# EAGLE board stencil (EAGLE 9.1.1), part 1 of 2
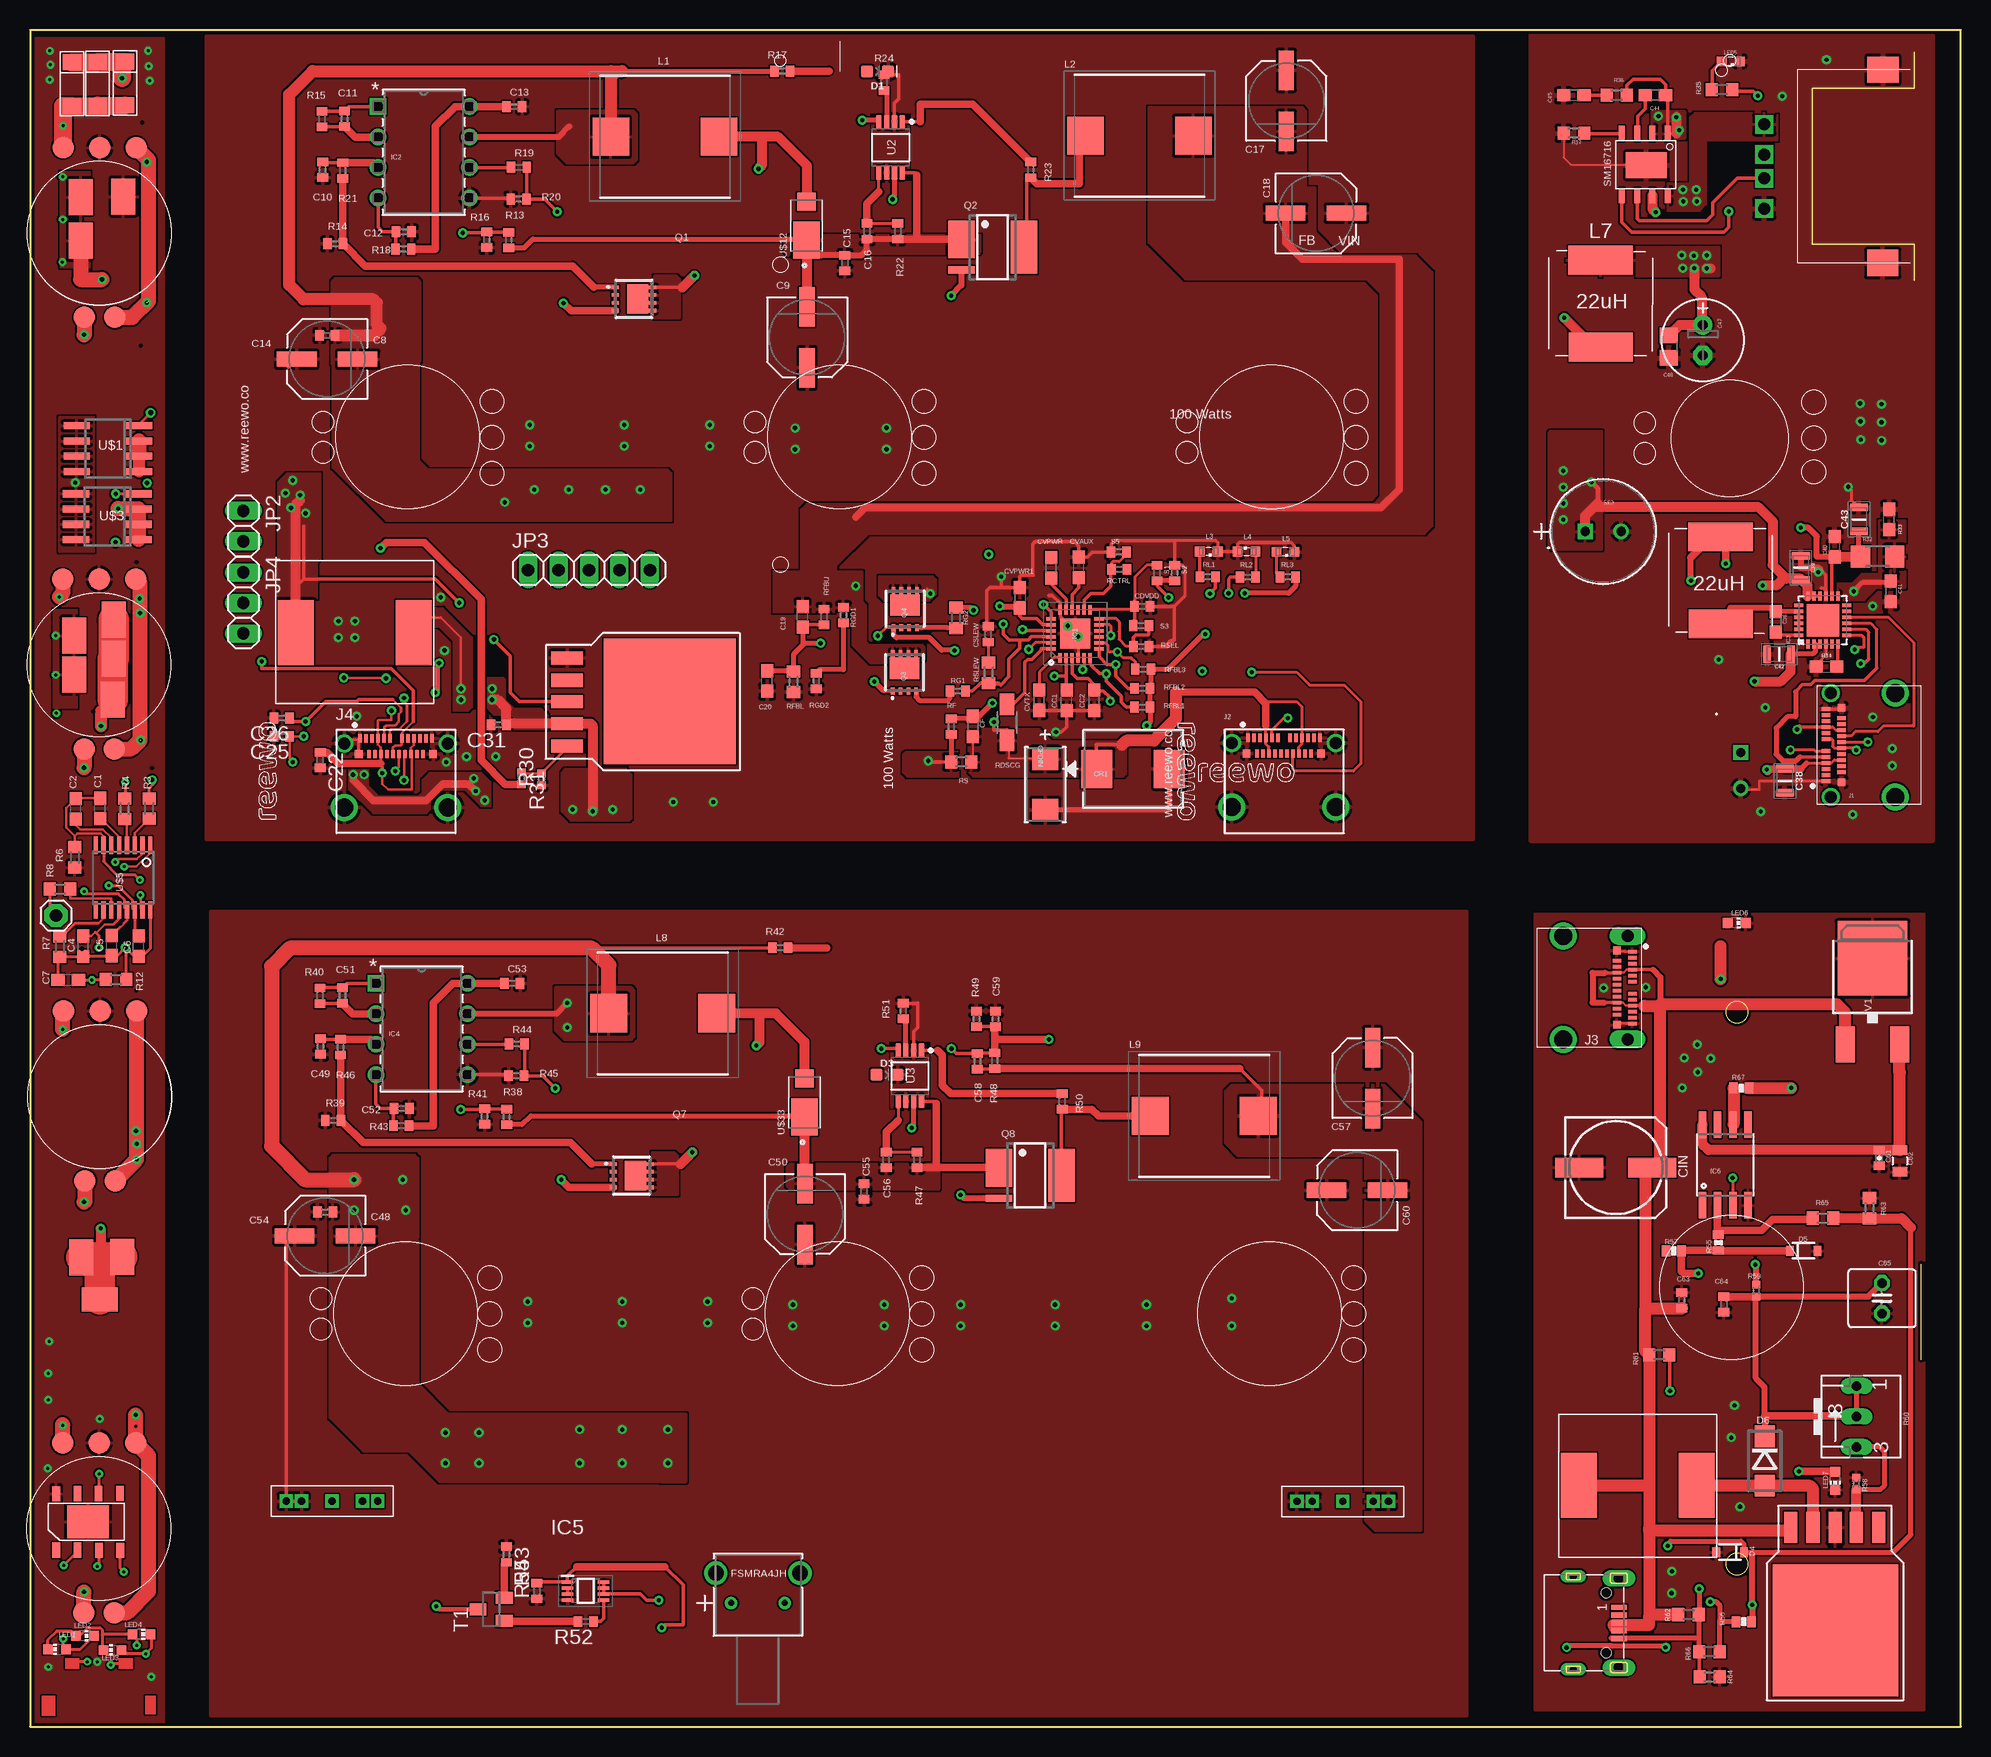
[diagram p0: board, top side]
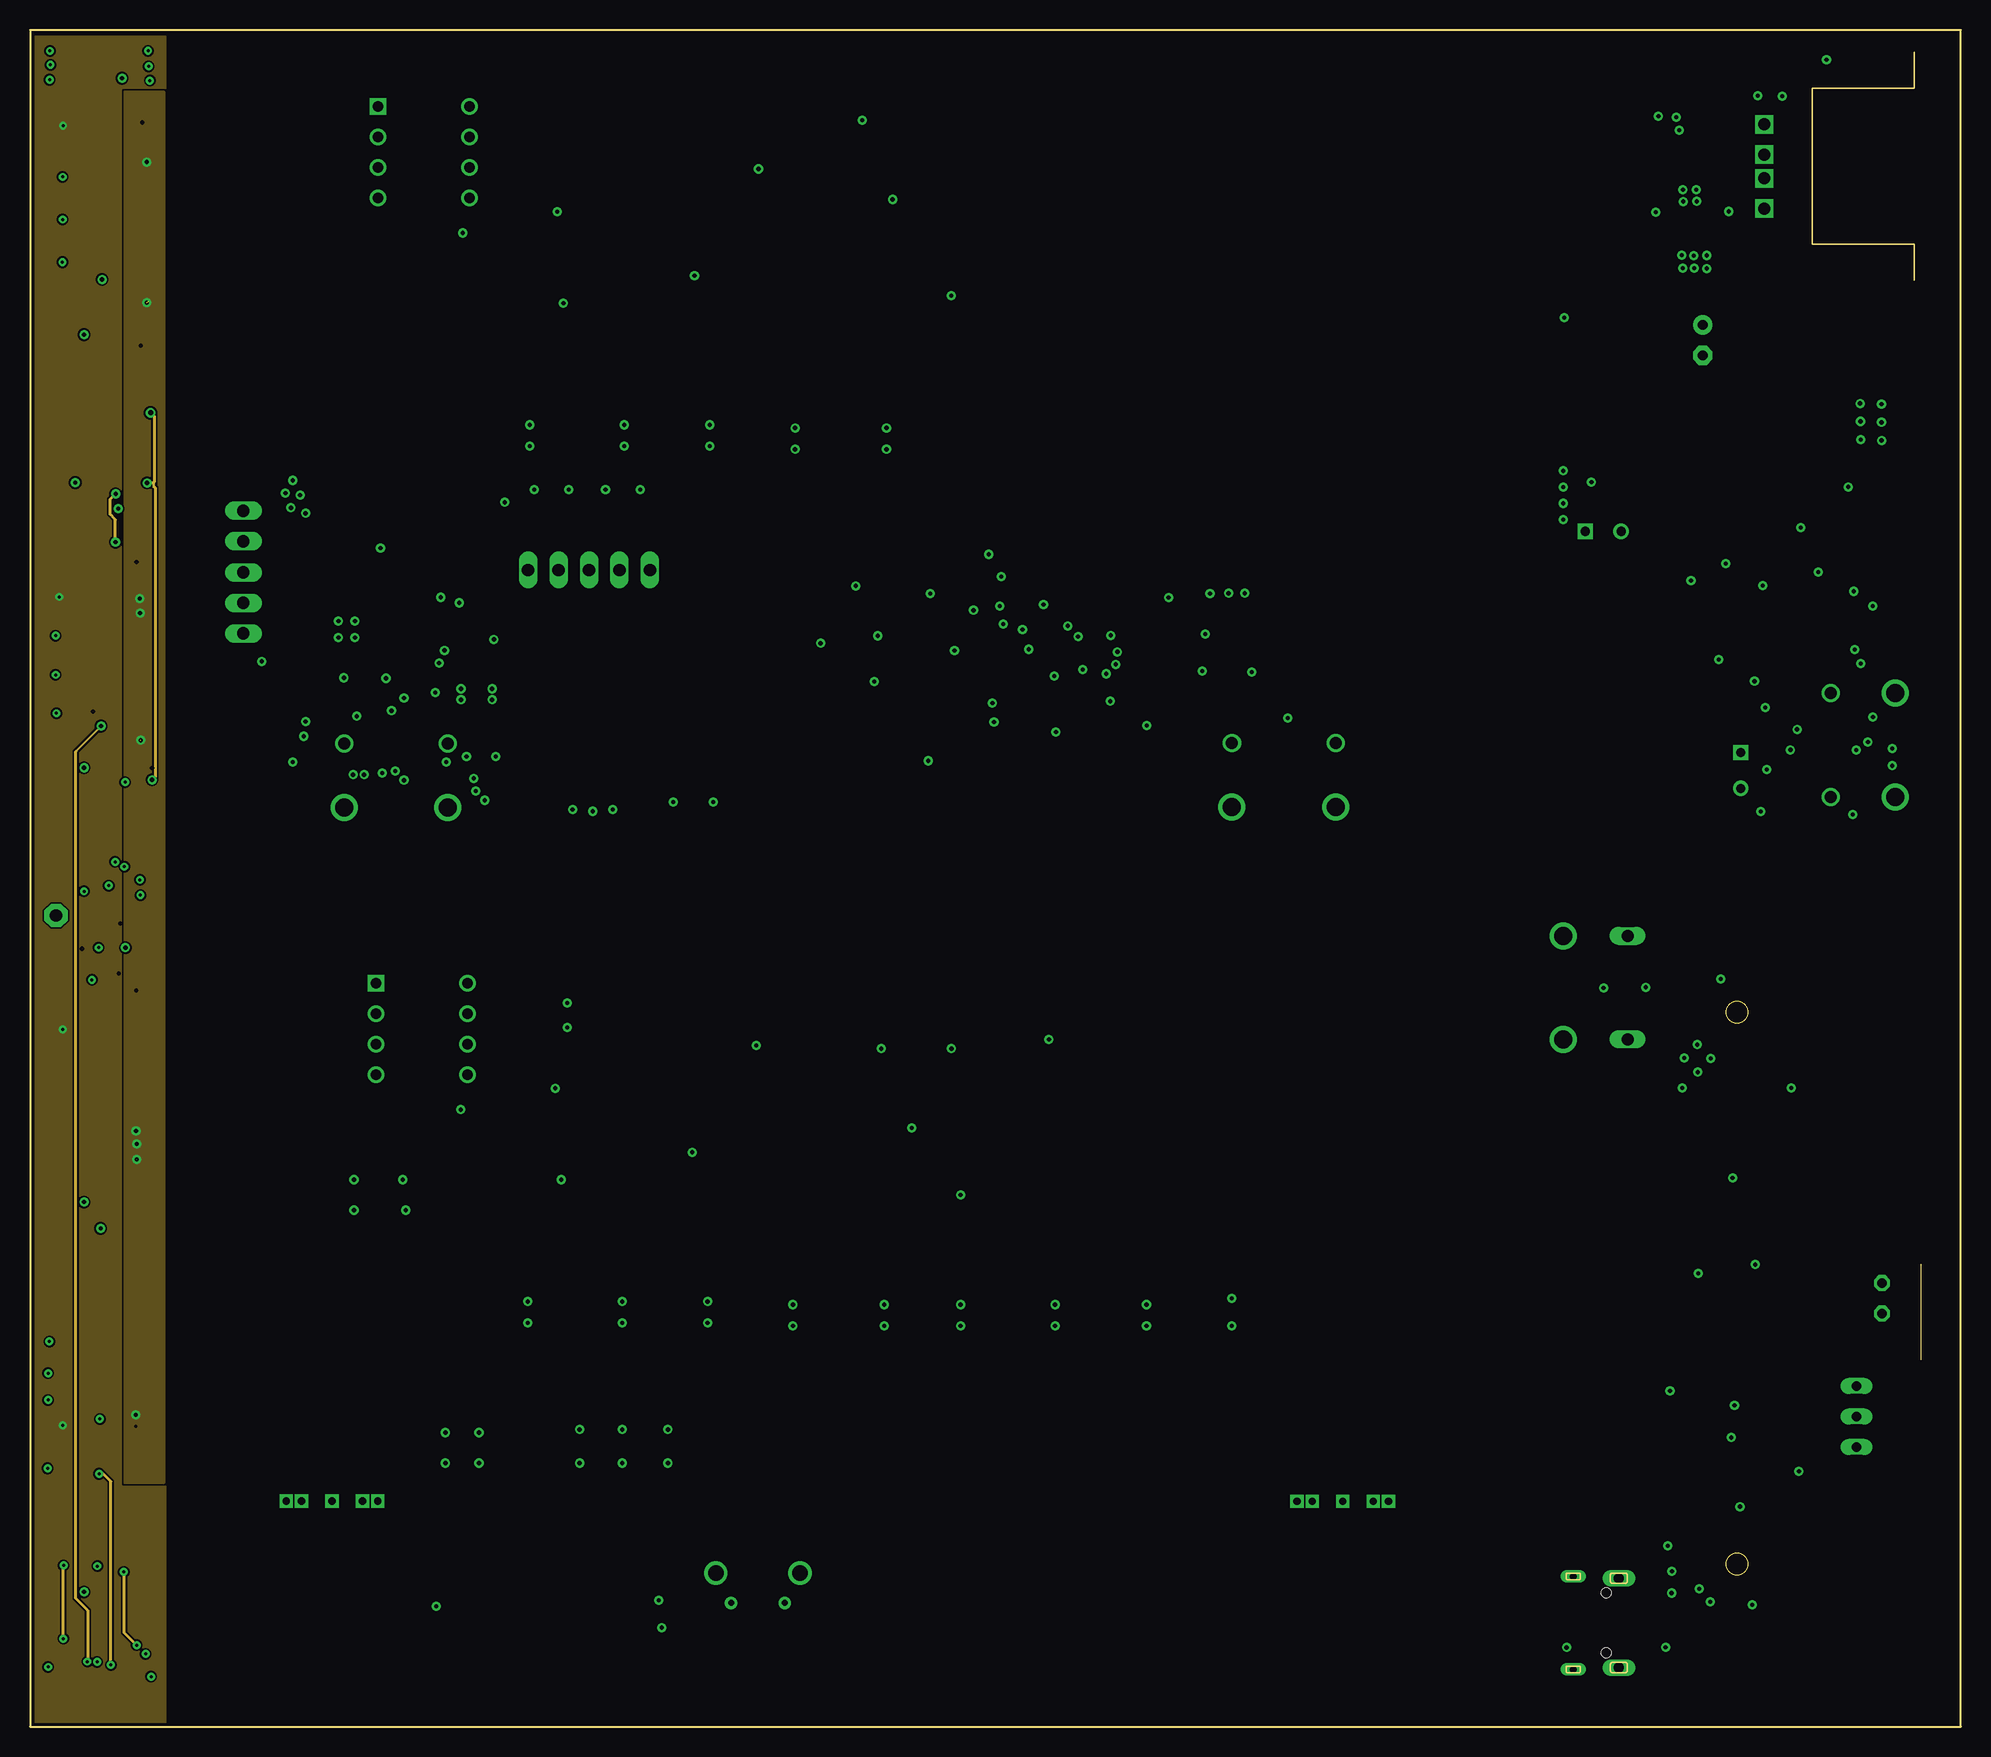
[diagram p1: board, inner layer Route2]
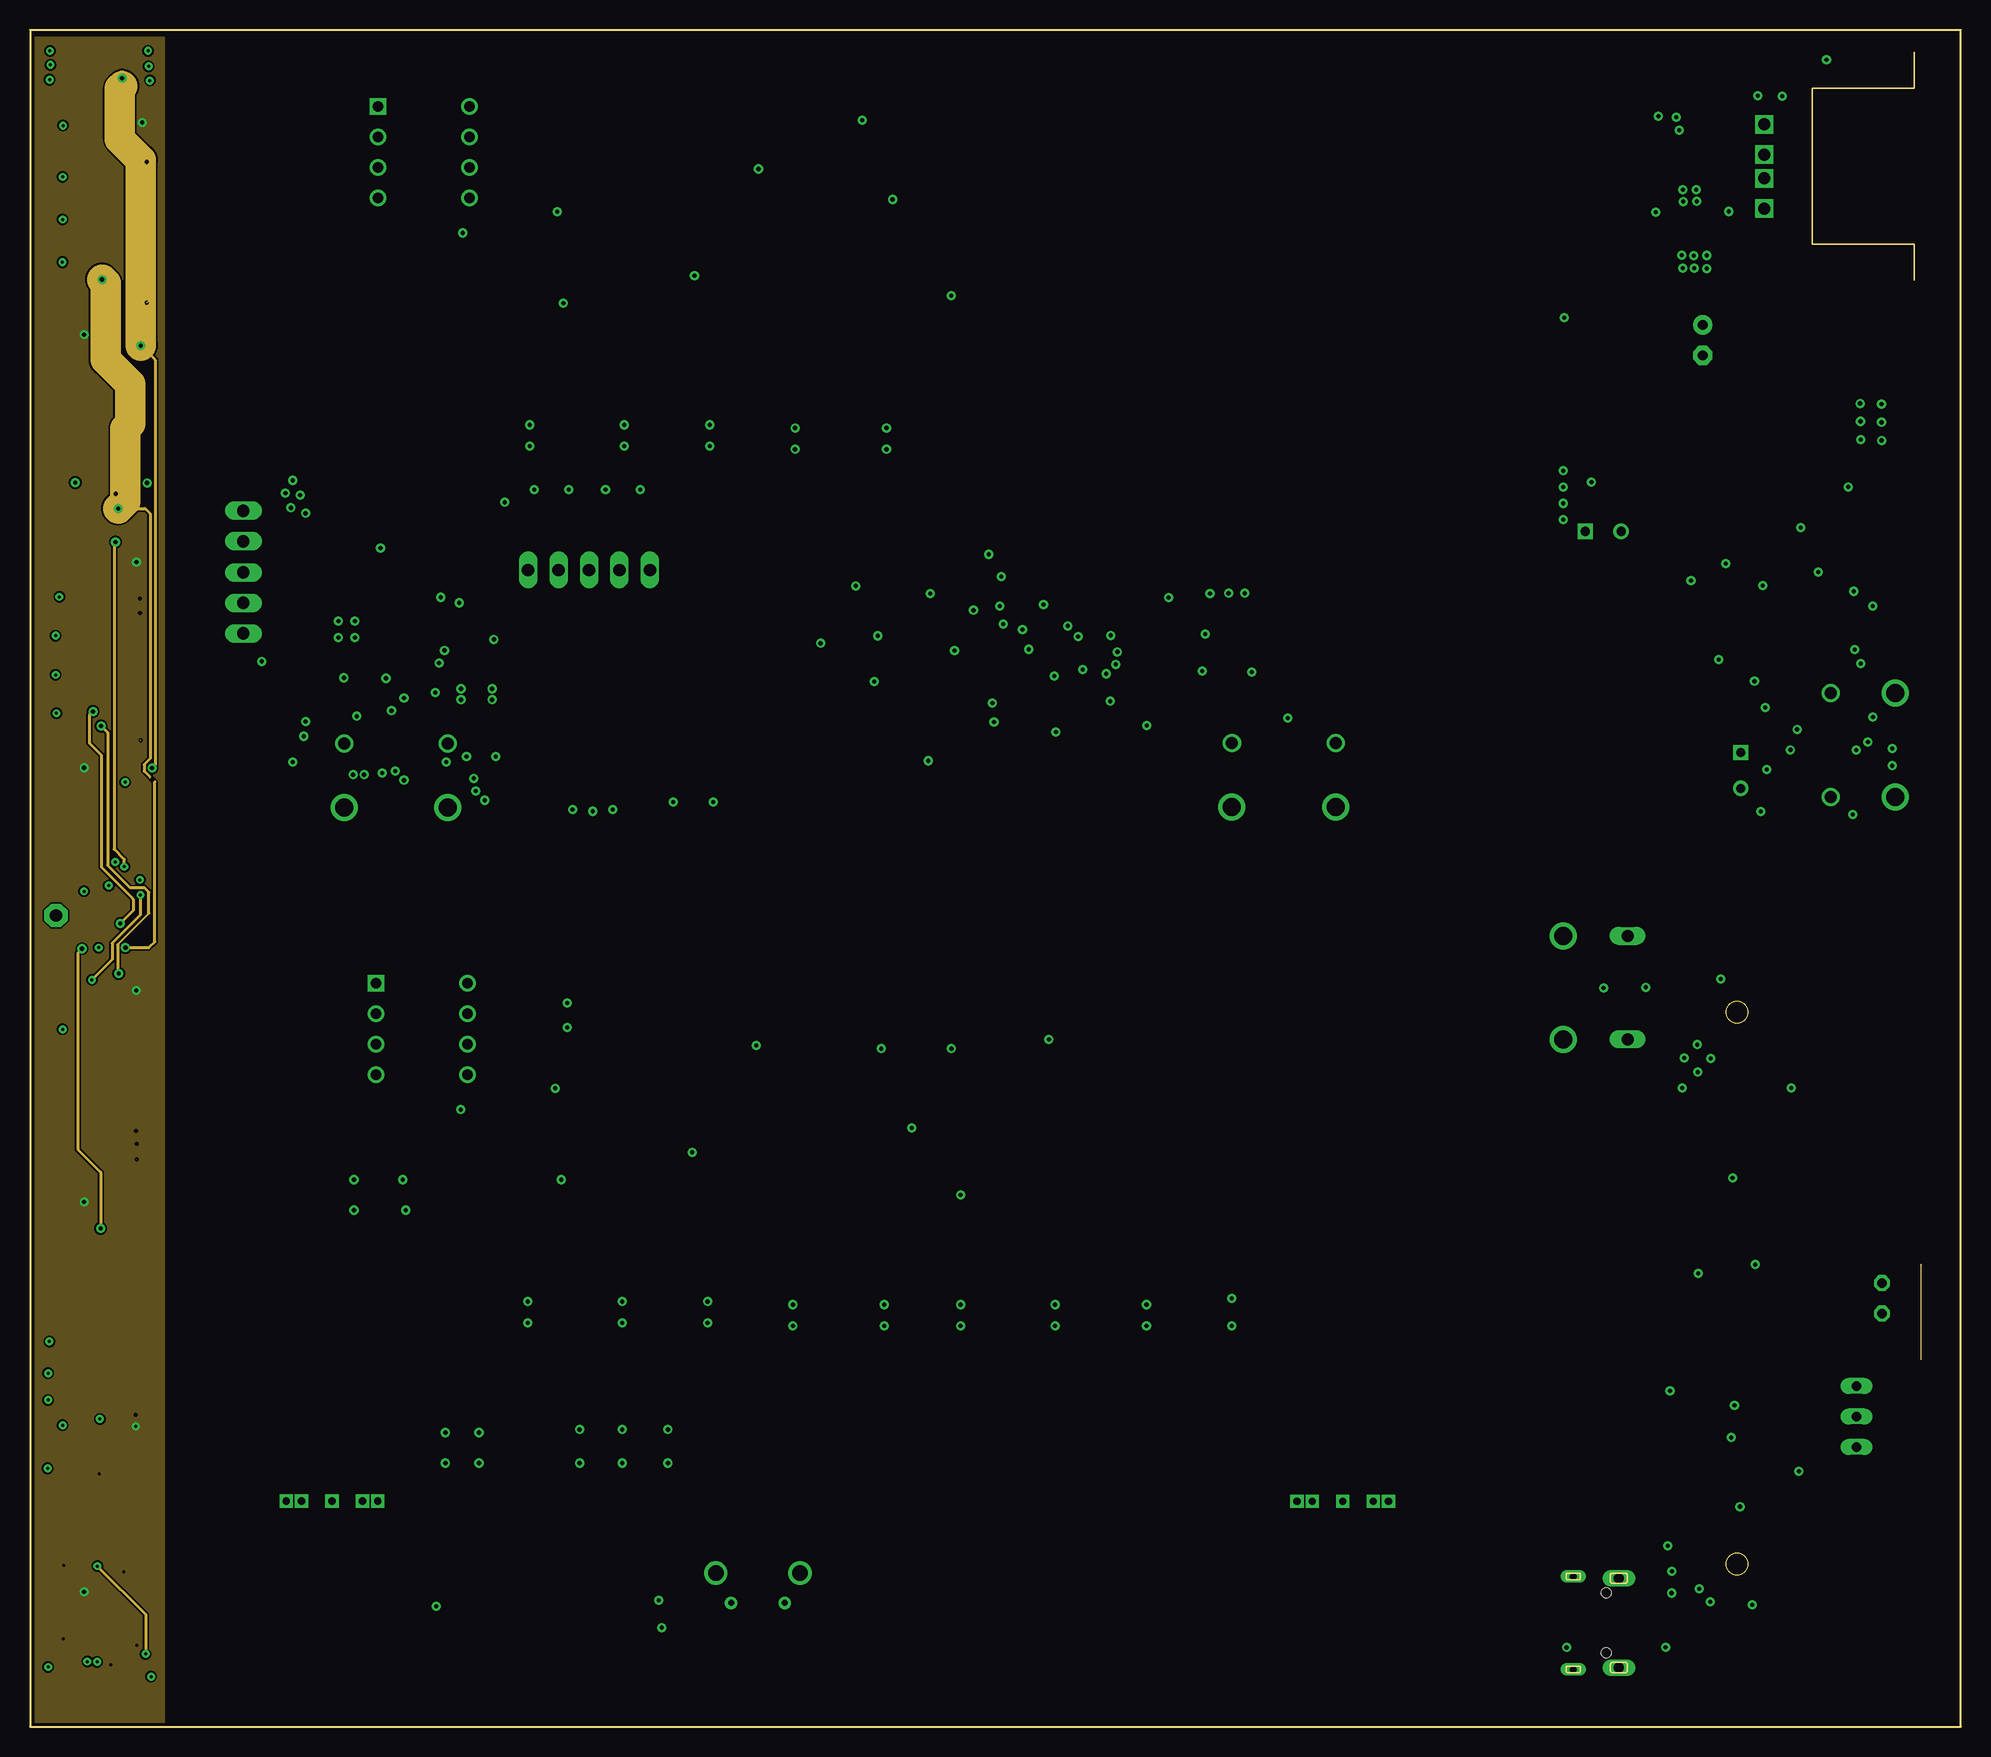
[diagram p2: board, inner layer Route15]
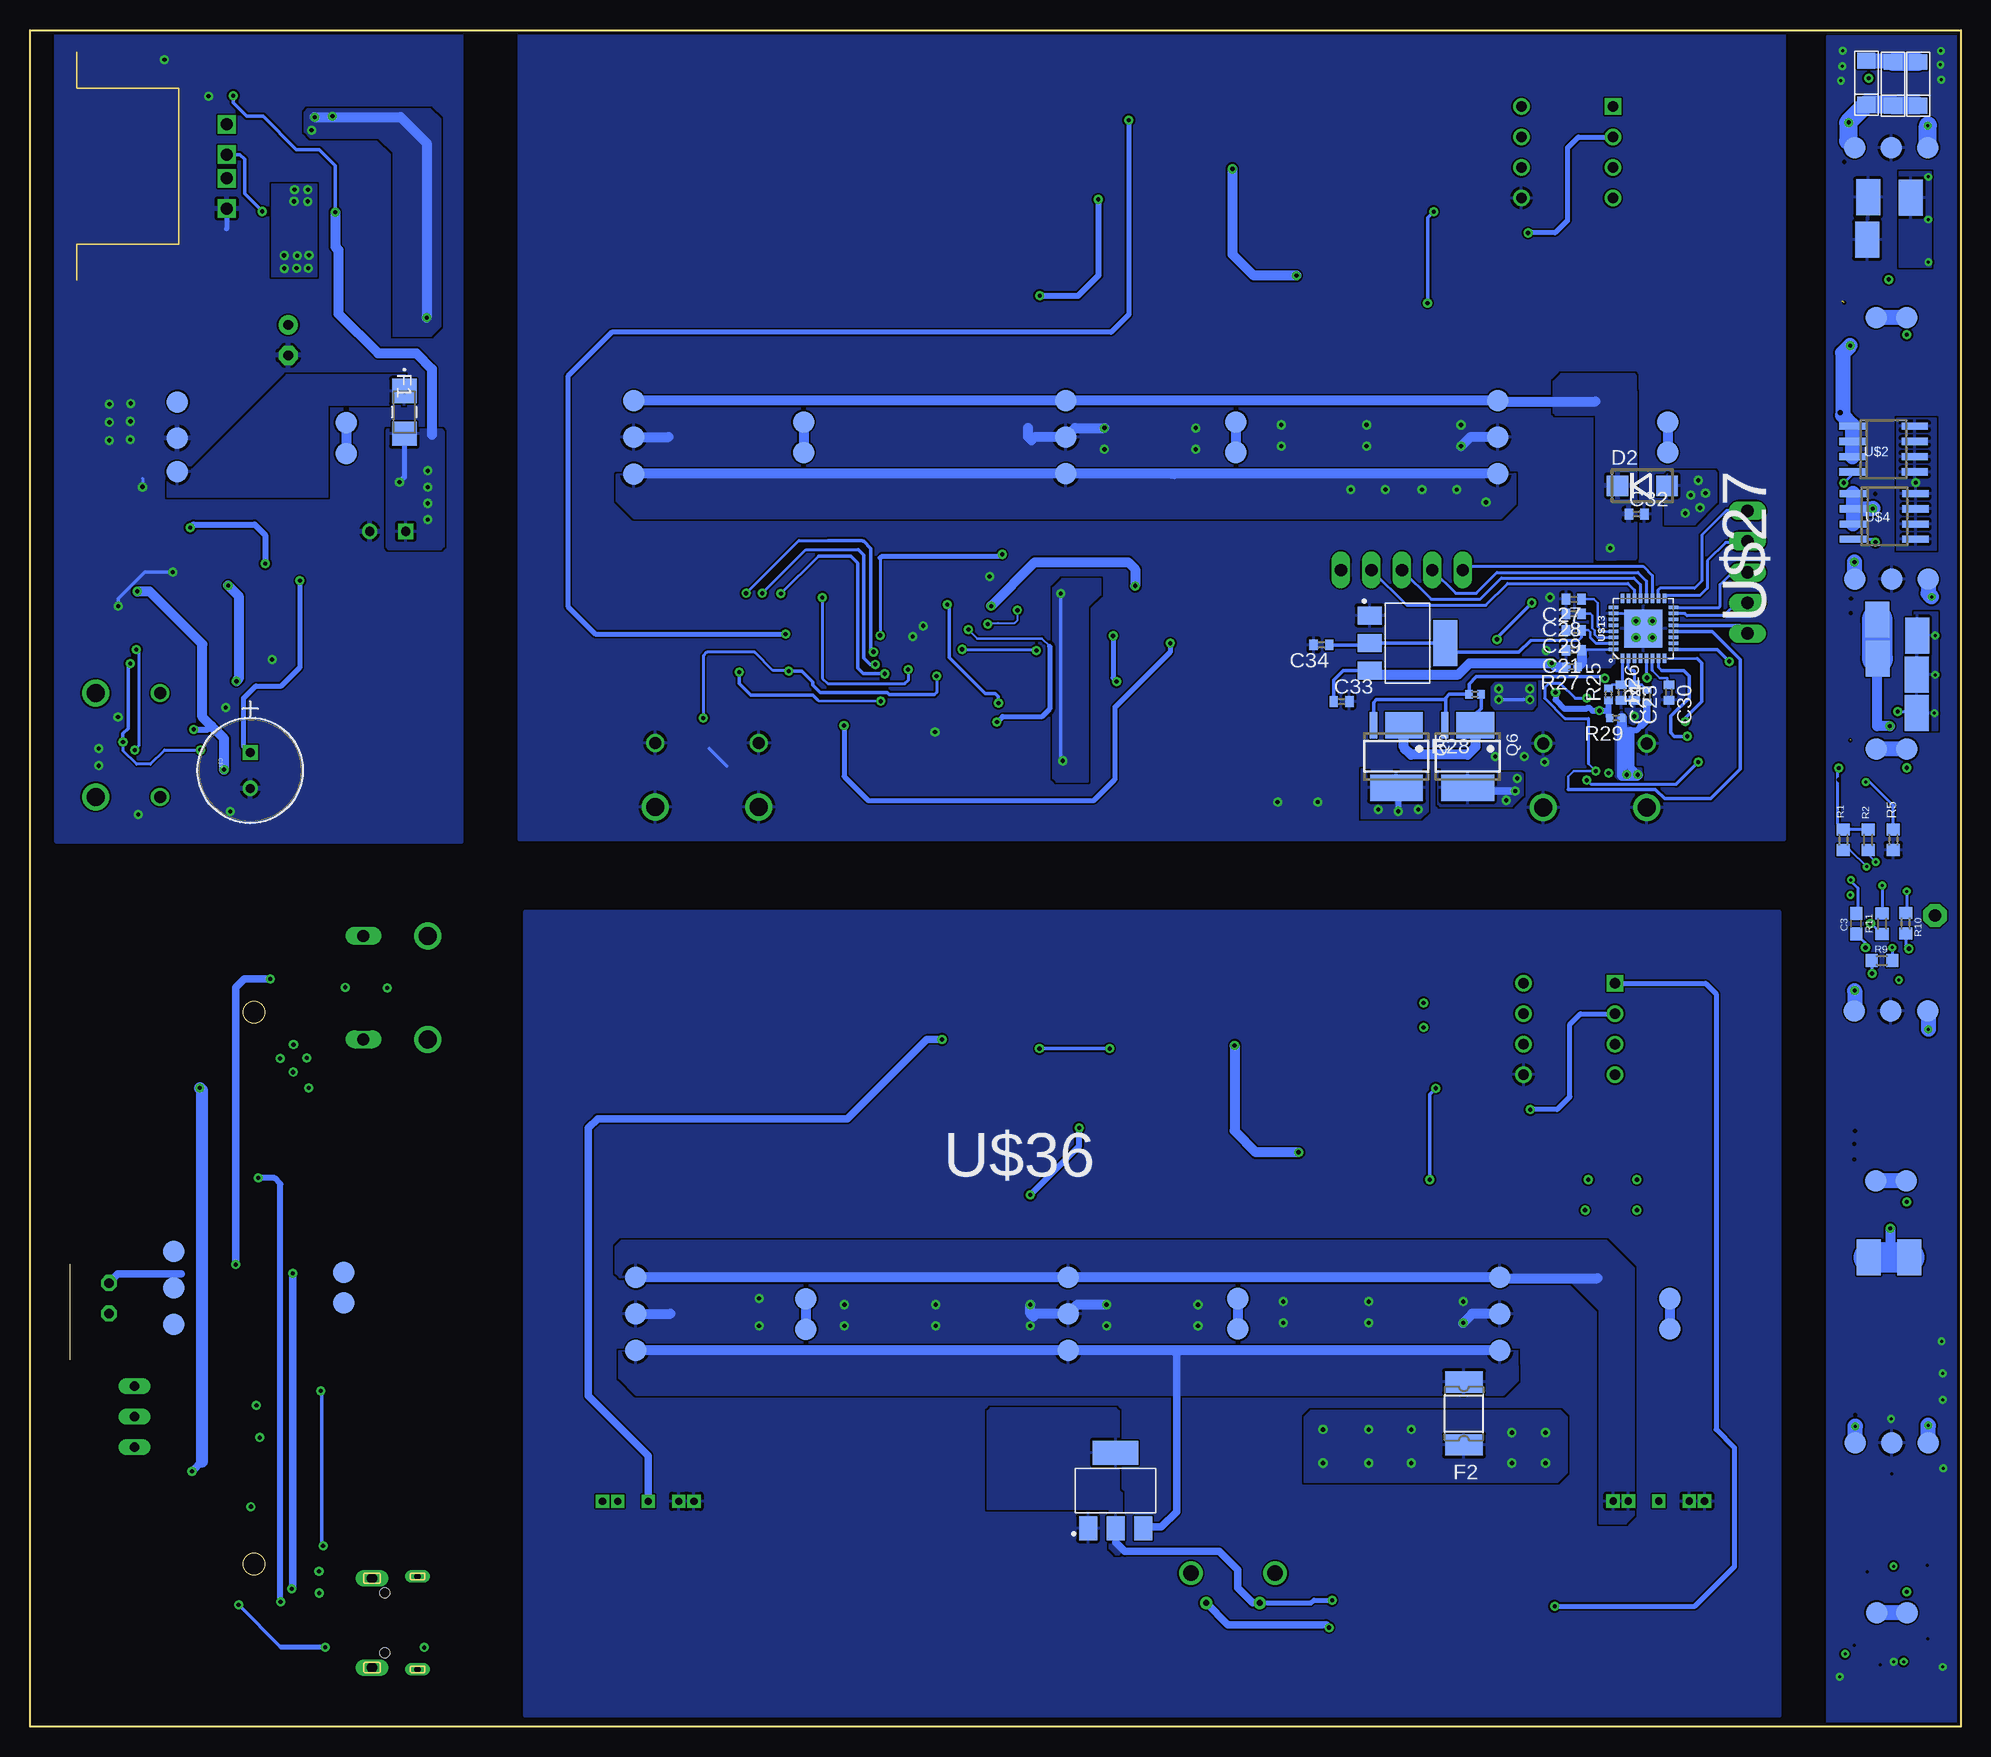
[diagram p3: board, bottom side, seen from below]

Size 160.91 x 141.43 mm. Coordinates in mm from the lower left corner, seen from the top.
Outline: 157.58,38.59 157.58,30.59
Outline: 0,141.43 0,0 160.91,0 160.91,141.43 0,141.43
Outline: circle at 142.25,59.56 radius 0.9
Outline: circle at 142.25,13.56 radius 0.9
Copper layers (1+2*15+16): Top 0.035mm / dielectric 1.5mm / Route2 0.035mm / dielectric 0.15mm / Route15 0.035mm / dielectric 0.2mm / Bottom 0.035mm
Design rules "default *": minimum track width 6mil, minimum drill 0.25mm, track to track 6mil, track to pad 6mil, pad to pad 6mil, via to via 6mil, smd to smd 6mil, copper to edge 10mil, drill to drill 6mil, minimum pad ring 10mil, minimum via ring 8mil, stop-mask expansion 4mil, vias tented up to drill 0mil, thermal gap 10mil

## Footprints (pad centres in the part's own frame; a part is rotated, then mirrored left to right if it is on the bottom)
SMDPAD = smd 3 x 2: P$1 0,0
C0603 = smd 1.1 x 1: 1 -0.85,0; 2 0.85,0
SV-D = smd 3.302 x 1.27: + -2.54,0; - 2.54,0
C0402 = smd 0.7 x 0.9: 1 -0.65,0; 2 0.65,0
PCAP_8X5-THRU-ELECT = drill 0.762 pad 1.27 square: 1 -2.997,0 | drill 0.762 pad 1.27: 2 0,0
CAPC2012X145N = smd 0.62 x 1.47: 1 -1,0; 2 1,0
C0805 = smd 1.3 x 1.5: 1 -0.95,0; 2 0.95,0
E2,5-7 = drill 0.813 pad 1.6: + -1.27,0 | drill 0.813 pad 1.6 octagon: - 1.27,0
0402-CAP = smd 0.7 x 0.9: 1 -0.65,0; 2 0.65,0
0805 = smd 0.8 x 1.2: 1 -0.9,0; 2 0.9,0
C025-060X050 = drill 0.813 octagon: 1 -1.27,0; 2 1.27,0
153CLV-0807 = smd 4 x 1.6: + 3.05,0; - -3.05,0
CAPT6032N-L = smd 1.879 x 2.2: 1 -2.136,0; 2 2.136,0
SMC-M = smd 2.587 x 3.18: 1 -3.026,0; 2 3.026,0
LED-0603 = smd 1 x 1: A -0.877,0; C 0.877,0
DO214BA = smd 1.8 x 1.7: A 2.05,0; C -2.05,0
SOD-323 = smd 0.63 x 0.83: 1 -1.15,0; 2 1.15,0
FUS_CB_CC12H = smd 2.032 x 2.032: 1 -1.778,0; 2 1.778,0
1812L = smd 1.78 x 3.15: 1 -2.62,0; 2 2.62,0
DECADE-SM16716 = smd 1.27 x 0.5: 1 -0.1,3.81; 2 -0.1,2.54; 3 -0.1,1.27; 4 -0.1,0; 5 5.08,0; 6 5.08,1.27; 7 5.08,2.54; 8 5.08,3.81 | smd 2.15 x 3.402: 9 2.54,2.04
QFN50P400X400X100-25N = smd 0.8 x 0.3: 1 -2,1.25; 2 -2,0.75; 3 -2,0.25; 4 -2,-0.25; 5 -2,-0.75; 6 -2,-1.25; 13 2,-1.25; 14 2,-0.75; 15 2,-0.25; 16 2,0.25; 17 2,0.75; 18 2,1.25 | smd 0.3 x 0.8: 7 -1.25,-2; 8 -0.75,-2; 9 -0.25,-2; 10 0.25,-2; 11 0.75,-2; 12 1.25,-2; 19 1.25,2; 20 0.75,2; 21 0.25,2; 22 -0.25,2; 23 -0.75,2; 24 -1.25,2 | smd 2.5 x 2.5: 25 0,0
P8 = drill 0.864 pad 1.372 square: 1 -7.62,7.62 | drill 0.864 pad 1.372: 2 -7.62,5.08; 3 -7.62,2.54; 4 -7.62,0; 5 0,0; 6 0,2.54; 7 0,5.08; 8 0,7.62
QFN24-4X4 = smd 0.75 x 0.3: AGND 2,-0.25; FS -2,-1.25; GND -2,-0.25; NC -2,1.25; NC5 -2,-0.75; VIN -2,0.75; VIN2 -2,0.25; VIN16 2,0.25; VIN17 2,0.75; VIN18 2,1.25; VOUT 2,-1.25; VSP 2,-0.75 | smd 0.3 x 0.75: BST -1.25,2; CC1 -0.25,-2; CC2 0.25,-2; DM -1.25,-2; DP -0.75,-2; LX20 0.75,2; LX21 0.25,2; LX22 -0.25,2; LX23 -0.75,2; NC11 0.75,-2; NC12 1.25,-2; NDRV 1.25,2 | smd 2.7 x 2.7: EXP 0,0
SOT50P310X90-8N = smd 0.95 x 0.3: 1 -1.5,0.75; 2 -1.5,0.25; 3 -1.5,-0.25; 4 -1.5,-0.75; 5 1.5,-0.75; 6 1.5,-0.25; 7 1.5,0.25; 8 1.5,0.75
SO08-EIAJ = smd 0.61 x 2.21: 1 -1.905,-3.378; 2 -0.635,-3.378; 3 0.635,-3.378; 4 1.905,-3.378; 5 1.905,3.353; 6 0.635,3.353; 7 -0.635,3.353; 8 -1.905,3.353
INDUCTOR-SMD = smd 3 x 5.4: P$1 -4.9,0; P$2 4.9,0
MOLEX_105450-0101_0 = drill 1 pad 1.016: 1 -4.32,3.36; 2 4.32,3.36 | drill 1.5 pad 2.184: 3 -4.32,-2; 4 4.32,-2 | smd 0.3 x 0.7: A1 -3,3.77; A2 -2.5,3.77; A3 -2,3.77; A4 -1.5,3.77; A5 -1,3.77; A6 -0.5,3.77; A7 0.5,3.77; A8 1,3.77; A9 1.5,3.77; A10 2,3.77; A11 2.5,3.77; A12 3,3.77; B2 2.25,2.47; B3 1.75,2.47; B4 1.25,2.47; B5 0.75,2.47; B6 0.25,2.47; B7 -0.25,2.47; B8 -0.75,2.47; B9 -1.25,2.47; B10 -1.75,2.47; B11 -2.25,2.47 | smd 0.635 x 0.635: B1 3.1,2.47; B12 -3.1,2.47
MOLEX_105450-0101_0' = drill 1 pad 1.016 long: 1 -4.32,3.36; 2 4.32,3.36 | drill 1.5 pad 2.184: 3 -4.32,-2; 4 4.32,-2 | smd 0.3 x 0.7: A1 -3,3.77; A2 -2.5,3.77; A3 -2,3.77; A4 -1.5,3.77; A5 -1,3.77; A6 -0.5,3.77; A7 0.5,3.77; A8 1,3.77; A9 1.5,3.77; A10 2,3.77; A11 2.5,3.77; A12 3,3.77; B2 2.25,2.47; B3 1.75,2.47; B4 1.25,2.47; B5 0.75,2.47; B6 0.25,2.47; B7 -0.25,2.47; B8 -0.75,2.47; B9 -1.25,2.47; B10 -1.75,2.47; B11 -2.25,2.47 | smd 0.635 x 0.635: B1 3.1,2.47; B12 -3.1,2.47
1X01 = drill 1.016 pad 1.93 octagon: 1 0,0
1X02 = drill 1.016 long: 1 -1.27,0; 2 1.27,0
1X05 = drill 1.016 long: 1 -5.08,0; 2 -2.54,0; 3 0,0; 4 2.54,0; 5 5.08,0
1X03 = drill 1.016 long: 1 -2.54,0; 2 0,0; 3 2.54,0
INDPM108102X400N = smd 3.05 x 3.2: 1 -4.5,0; 2 4.5,0
LED_SML0603 = smd 0.8 x 0.8: A 0.75,0; C -0.75,0
IHLP-3232DZ-11 = smd 2.4 x 5.35: 1 -3.61,0; 2 3.631,0.009
CHIP-LED0603 = smd 0.8 x 0.8: A 0,-0.75; C 0,0.75
629105150521 = smd 0.45 x 1.3: 1 -1.3,1.05; 2 -0.65,1.05; 3 0,1.05; 4 0.65,1.05; 5 1.3,1.05 | drill 0.85 pad 1.2 long: SHELL -3.725,1.05; SHELL1 3.725,1.05 | drill 0.55 pad 0.9 long: SHELL2 -3.875,-2.75; SHELL3 3.875,-2.75 | hole 0.8: -2.5,0; 2.5,0
Q3A = smd 0.6 x 0.3: 1 -1.55,0.975; 2 -1.55,0.325; 3 -1.55,-0.325; 4 -1.55,-0.975 | smd 0.635 x 0.3: 5 1.532,-0.975; 6 1.532,-0.325; 7 1.532,0.325; 8 1.532,0.975 | smd 1.775 x 2.45: 9 0.328,0
SO08-E3 = smd 3.15 x 2.2: 1-3 -0.635,-2.6 | smd 0.6 x 2.2: 4 1.905,-2.6 | smd 4.4 x 2.2: 5-8 0,2.6
R0603 = smd 1 x 1.1: 1 -0.85,0; 2 0.85,0
R0402 = smd 0.7 x 0.9: 1 -0.65,0; 2 0.65,0
R0402' = smd 0.6 x 0.7: 1 -0.5,0; 2 0.5,0
R1206 = smd 1.6 x 1.803: 1 -1.422,0; 2 1.422,0
0603 = smd 1.1 x 1: 1 -0.85,0; 2 0.85,0
0402-RES = smd 0.7 x 0.9: 1 -0.65,0; 2 0.65,0
B25V = drill 0.813 long: A 2.54,0.635; E -2.54,0.635; S 0,0.635
R1206W = smd 1.8 x 1.2: 1 -1.499,0; 2 1.499,0
SOT23 = smd 1 x 1.4: 1 -0.95,-1.1; 2 0.95,-1.1; 3 0,1.1
SWITCH_FSMRA4JH = drill 0.5 pad 1.016: 1 -5.74,-2.489; 2 -1.27,-2.489 | drill 1.295 pad 1.803: 3 -7.01,0; 4 0,0
TEXAS_INSTRUMENTS_LM3489MM-NOPB_0 = smd 1.15 x 0.45: 1 -2.125,0.975; 2 -2.125,0.325; 3 -2.125,-0.325; 4 -2.125,-0.975; 5 2.125,-0.975; 6 2.125,-0.325; 7 2.125,0.325; 8 2.125,0.975
SOIC8 = smd 0.6 x 2.2: 1 -1.905,-2.6; 2 -0.635,-2.6; 3 0.635,-2.6; 4 1.905,-2.6; 5 1.905,2.6; 6 0.635,2.6; 7 -0.635,2.6; 8 -1.905,2.6
TSSOP-16 = smd 0.35 x 1.43: 1 -2.275,-2.7; 2 -1.625,-2.7; 3 -0.975,-2.7; 4 -0.325,-2.7; 5 0.325,-2.7; 6 0.975,-2.7; 7 1.625,-2.7; 8 2.275,-2.7; 9 2.275,2.7; 10 1.625,2.7; 11 0.975,2.7; 12 0.325,2.7; 13 -0.325,2.7; 14 -0.975,2.7; 15 -1.625,2.7; 16 -2.275,2.7
POGOPINSNEW = smd 1.8 x 1.8: CH -3.032,7.215; GND 0.018,7.216; S1 1.282,-6.941; S2 -1.252,-6.942; VCC 3.066,7.215
POGOPINSNEW' = smd 1.8 x 1.8 bottom: CH -3.032,7.215; GND 0.018,7.216; S1 1.282,-6.941; S2 -1.252,-6.942; VCC 3.066,7.215
ETA9740 = smd 0.635 x 1.27: BAT 0.89,2.36; ISET 2.66,2.38; LED1 -0.86,-2.36; LED2 0.91,-2.37; LED3 2.69,-2.38; OUT -0.88,2.36; PGND -2.65,2.34; SW -2.65,-2.35 | smd 3.5 x 2.7: GND 0,0
DIO_V3PAN50-M3/I = smd 1.5 x 1.52: A 2.01,0 | smd 3.1 x 2.2: C -1.21,0
QFN-32 = smd 0.285 x 0.8: 1 -1.75,-2.5; 2 -1.25,-2.5; 3 -0.75,-2.5; 4 -0.25,-2.5; 5 0.25,-2.5; 6 0.75,-2.5; 7 1.25,-2.5; 8 1.75,-2.5; 17 1.75,2.5; 18 1.25,2.5; 19 0.75,2.5; 20 0.25,2.5; 21 -0.25,2.5; 22 -0.75,2.5; 23 -1.25,2.5; 24 -1.75,2.5 | smd 0.8 x 0.285: 9 2.5,-1.75; 10 2.5,-1.25; 11 2.5,-0.75; 12 2.5,-0.25; 13 2.5,0.25; 14 2.5,0.75; 15 2.5,1.25; 16 2.5,1.75; 25 -2.5,1.75; 26 -2.5,1.25; 27 -2.5,0.75; 28 -2.5,0.25; 29 -2.5,-0.25; 30 -2.5,-0.75; 31 -2.5,-1.25; 32 -2.5,-1.75 | smd 3.15 x 3.15: EP 0,0
TO263-5L = smd 1.1 x 2.6: P$1 -3.62,-6.37; P$2 -1.76,-6.37; P$3 0,-6.37; P$4 1.85,-6.37; P$5 3.72,-6.37 | smd 10.45 x 11: P$6 -0.03,2.21
DIODE = smd 1.32 x 1.52: A -1.84,-0.07; K 1.8,-0.07
SOT230P700X180-4N = smd 1.5 x 2: GND -2.3,-3.15; VIN 2.3,-3.15; VOUT 0,-3.15 | smd 3.8 x 2: VOUT1 0,3.15
MIDMOUNT = drill 1 square: DM 0.994,0.002; DP -1.003,-0.003; GND -3.506,-0.002; V+ 3.495,-0.001 | smd 2.2 x 2.6: NC1 -8.057,-9.887; NC2 8.057,-9.906
POGOPINSNEW'' = smd 1.8 x 1.8 bottom: CH -11.016,3.024; GND -10.997,0.023; S1 -25.081,-1.27; S2 -25.086,1.301; VCC -10.997,-2.794
DCLENOVOFEMALE = drill 0.6 square: FB 0,1.27; GND 0,-1.27; GND1 0,-2.54; VCC 0,5.08; VCC1 0,3.81
DPACK = smd 1.6 x 3: 1 -2.28,-4.8; 3 2.28,-4.8 | smd 5.8 x 6.2: 4 0,2.38

## Placement (x,y rotation side)
1  [SMDPAD]  4.22,123.85 270 top
2  [SMDPAD]  4.23,127.47 90 top
3  [SMDPAD]  3.67,90.94 90 top
4  [SMDPAD]  3.69,87.7 90 top
5  [SMDPAD]  3.65,90.93 270 bottom
6  [SMDPAD]  3.68,87.68 270 bottom
7  [SMDPAD]  4.26,39.13 90 top
8  [SMDPAD]  7.67,39.15 90 top
9  [SMDPAD]  4.29,39.13 270 bottom
10  [SMDPAD]  7.67,39.13 270 bottom
11  [SMDPAD]  6.96,89.04 90 top
12  [SMDPAD]  6.96,92.26 90 top
13  [SMDPAD]  6.93,89.03 270 bottom
14  [SMDPAD]  6.97,92.27 270 bottom
15  [SMDPAD]  7.78,127.53 90 top
16  [SMDPAD]  7.72,127.48 270 bottom
17  [SMDPAD]  7.81,123.94 90 bottom
18  [SMDPAD]  6.91,85.63 90 top
19  [SMDPAD]  5.82,35.62 0 top
20  [SMDPAD]  3.68,84.48 90 bottom
21  [SMDPAD]  4.19,127.46 90 bottom
C1  [C0603]  5.84,76.54 90 top
C2  [C0603]  3.81,76.51 90 top
C3  [C0603]  8.7,66.93 90 bottom
C4  [C0603]  4.44,65.04 90 top
C5  [C0603]  6.81,65.1 90 top
C6  [C0603]  9.05,65.05 90 top
C7  [C0603]  3.18,62.25 0 top
C8  [SV-D]  24.77,113.99 0 top
C9  [SV-D]  64.76,115.8 90 top
C10  330pf  [C0402]  24.39,129.77 270 top
C11  220pf  [C0402]  26.22,134.03 270 top
C12  2.2nf  [C0402]  31.15,124.61 0 top
C13  100nf  [C0402]  40.37,135.04 0 top
C14  100nf  [C0402]  24.78,115.97 180 top
C15  100nf  [C0402]  67.91,122 270 top
C16  [C0402]  69.75,124.64 90 top
C17  [SV-D]  104.7,135.52 270 top
C18  [SV-D]  107.17,126.16 180 top
C19  [C0603]  64.38,92.51 90 top
C20  [C0603]  61.43,87.16 90 top
C21  [C0402]  32.26,89.71 180 bottom
C22  [C0402]  24.18,80.57 270 top
C23  [C0402]  27.23,86.21 270 bottom
C24  [C0402]  28.3,86.21 270 bottom
C25  [C0402]  20.98,82.55 180 top
C26  [C0402]  20.98,84.07 180 top
C27  [C0402]  32.26,93.98 180 bottom
C28  [C0402]  32.26,92.76 180 bottom
C29  [C0402]  32.26,91.39 180 bottom
C30  [C0402]  24.33,86.21 270 bottom
C31  105uf  [C0402]  39.06,83.52 180 top
C32  105uf  [C0402]  27.02,101.07 0 bottom
C33  [C0402]  51.61,85.45 0 bottom
C34  [C0402]  53.29,90.17 180 bottom
C35  100uF  [PCAP_8X5-THRU-ELECT]  132.59,99.63 0 top
C36  0.1uF  [C0603]  145.47,92.09 270 top
C37  220uF  [PCAP_8X5-THRU-ELECT]  142.56,78.21 270 bottom
C38  22uF  [CAPC2012X145N]  146.24,78.83 270 top
C39  22uF  [CAPC2012X145N]  147.56,96.6 270 top
C40  0.1uF  [C0603]  150.39,98.35 90 top
C41  0.1uF  [C0603]  155.07,94.63 270 top
C42  22uF  [CAPC2012X145N]  145.77,89.39 180 top
C43  22uF  [CAPC2012X145N]  152.41,100.63 90 top
C44  0.1uf  [C0603]  135.45,135.99 180 top
C45  1nf  [C0603]  128.66,135.97 180 top
C46  10uf  [C0805]  136.58,115.03 270 top
C47  220uf  [E2,5-7]  139.4,115.57 270 top
C48  [SV-D]  24.59,40.92 0 top
C49  330pf  [C0402]  24.21,56.7 270 top
C50  [SV-D]  64.58,42.73 90 top
C51  220pf  [C0402]  26.04,60.95 270 top
C52  2.2nf  [C0402]  30.97,51.53 0 top
C53  100nf  [C0402]  40.19,61.96 0 top
C54  100nf  [C0402]  24.6,42.9 180 top
C55  100nf  [C0402]  69.51,44.61 270 top
C56  [C0402]  71.35,47.25 90 top
C57  [SV-D]  111.89,54.06 270 top
C58  [C0402]  78.94,55.46 90 top
C59  [C0402]  80.45,58.99 90 top
C60  [SV-D]  110.59,44.71 0 top
C61  0.1uf  [0402-CAP]  154.1,47.4 270 top
C62  4.7uf  [0805]  155.83,47.16 270 top
C63  105uf  [C0402]  137.65,35.54 90 top
C64  105uf  [C0402]  141.15,35.2 270 top
C65  220uf  [C025-060X050]  154.33,35.71 270 top
CC1  [C0603]  86.39,85.55 90 top
CC2  [C0603]  88.7,85.56 90 top
CDVDD  0.22uf,10V  [C0402]  92.7,93.38 0 top
CF  [C0603]  78.55,83.37 270 top
CIN  47uf  [153CLV-0807]  132.16,46.6 0 top
CPDIN  T491C685K025ATCAPT6032N-L  [CAPT6032N-L]  84.6,78.52 270 top
CR1  B520C-13-FSMC-M  [SMC-M]  91.92,79.83 0 top
CSLEW  [C0402]  79.84,91.06 90 top
CVAUX  0.1uf,50V  [C0603]  87.41,96.64 90 top
CVPWR  0.1uf, 50V  [C0603]  85.12,96.59 90 top
CVPWR1  0.1uf, 50V  [C0603]  82.49,94.1 270 top
CVTX  [C0603]  84.12,85.56 90 top
D1  [LED-0603]  70.63,137.96 0 top
D2  [DO214BA]  26.55,103.44 0 bottom
D3  [LED-0603]  71.42,54.34 0 top
D4  3.6 Zener  [SOD-323]  141.67,14.54 180 top
D5  3.6 Zener  [SOD-323]  147.8,39.67 0 top
D6  [DO214BA]  144.57,22.15 270 top
F1  4A  [FUS_CB_CC12H]  129.71,109.56 270 bottom
F2  10A  [1812L]  41.41,26.11 90 bottom
IC  [DECADE-SM16716]  132.66,132.7 270 top
IC1  TPS25740BRGER  [QFN50P400X400X100-25N]  87.09,91.11 90 top
IC2  UC3843A_P_8  [P8]  36.62,127.42 0 top
IC3  SI7015-A10-FM  [QFN24-4X4]  149.4,92.23 90 top
IC4  UC3843A_P_8  [P8]  36.45,54.35 0 top
IC5  SN74AUP1G74DCUR  [SOT50P310X90-8N]  46.3,11.3 0 top
IC6  [SO08-EIAJ]  141.27,46.83 0 top
IND  [INDUCTOR-SMD]  27.07,91.2 180 top
IND1  [INDUCTOR-SMD]  133.98,20.11 0 top
J1  MOLEX_105450-0101  [MOLEX_105450-0101_0]  153.43,81.83 90 top
J2  MOLEX_105450-0101  [MOLEX_105450-0101_0]  104.49,78.65 0 top
J3  MOLEX_105450-0101MOLEX_105450-0101_0_0  [MOLEX_105450-0101_0']  129.77,61.6 270 top
J4  MOLEX_105450-0101  [MOLEX_105450-0101_0]  30.49,78.6 0 top
JP1  [1X01]  2.16,67.61 0 top
JP2  [1X02]  17.78,100.08 270 top
JP3  [1X05]  46.58,96.42 0 top
JP4  [1X03]  17.78,93.68 270 top
L1  IHLP4040DZER220M11  [INDPM108102X400N]  52.91,132.53 0 top
L2  IHLP4040DZER220M11  [INDPM108102X400N]  92.45,132.62 0 top
L3  [LED_SML0603]  98.23,97.95 180 top
L4  [LED_SML0603]  101.38,97.95 0 top
L5  [LED_SML0603]  104.61,97.93 180 top
L6  [IHLP-3232DZ-11]  140.88,95.54 90 top
L7  22uh  [IHLP-3232DZ-11]  130.88,118.62 270 top
L8  IHLP4040DZER220M11  [INDPM108102X400N]  52.73,59.46 0 top
L9  IHLP4040DZER220M11  [INDPM108102X400N]  97.86,50.91 0 top
LED1  [CHIP-LED0603]  2.24,6.45 90 top
LED2  [CHIP-LED0603]  4.57,7.57 270 top
LED3  [CHIP-LED0603]  6.88,6.4 90 top
LED4  [CHIP-LED0603]  9.28,7.7 270 top
LED5  [LED_SML0603]  141.73,138.81 180 top
LED6  [CHIP-LED0603]  142.23,66.99 270 top
LED7  [CHIP-LED0603]  150.44,20.49 180 top
MICROUSB  [629105150521]  131.36,8.65 270 top
Q1  CSD17579Q3A  [Q3A]  50.32,119 0 top
Q2  FDS4435BZ  [SO08-E3]  80.22,123.33 270 top
Q3  CSD17579Q3A  [Q3A]  72.87,87.88 90 top
Q4  CSD17579Q3A  [Q3A]  72.93,93.16 90 top
Q5  FDS4435BZ  [SO08-E3]  47.04,80.87 180 bottom
Q6  FDS4435BZ  [SO08-E3]  41.1,80.87 180 bottom
Q7  CSD17579Q3A  [Q3A]  50.14,45.93 0 top
Q8  FDS4435BZ  [SO08-E3]  83.35,45.94 270 top
R1  [R0603]  9.79,73.92 90 bottom
R2  [R0603]  7.72,73.91 90 bottom
R3  [R0603]  9.93,76.53 90 top
R4  [R0603]  7.89,76.52 90 top
R5  [R0603]  5.63,73.93 270 bottom
R6  [R0603]  3.73,72.46 90 top
R7  [R0603]  2.48,65.02 90 top
R8  [R0603]  2.5,69.81 0 top
R9  [R0603]  6.58,63.85 0 bottom
R10  [R0603]  4.6,66.96 90 bottom
R11  [R0603]  6.57,66.93 90 bottom
R12  [R0603]  7.16,62.27 180 top
R13  fb2  [R0402]  39.9,123.91 270 top
R14  0.05R  [R0402]  25.44,123.6 0 top
R15  100k  [R0402]  24.34,134 90 top
R16  fb1  [R0402]  38.06,123.94 90 top
R17  330  [R0402]  62.69,138 180 top
R18  8.2k  [R0402]  31.12,123.16 0 top
R19  4.7R  [R0402]  40.74,129.98 0 top
R20  6.8k  [R0402]  40.71,127.33 0 top
R21  1k  [R0402]  26.06,129.72 270 top
R22  [R0402]  72.32,124.64 270 top
R23  [R0402]  83.4,129.76 270 top
R24  [R0402]  71.17,137.04 90 top
R25  [R0402']  29.36,86.06 90 bottom
R26  [R0402']  26.16,85.9 90 bottom
R27  [R0402']  32.41,88.34 180 bottom
R28  [R0402']  40.49,86.06 180 bottom
R29  [R0402']  28.75,84.07 180 bottom
R30  1K  [R0402']  42.61,78.96 90 top
R31  1K  [R0402']  40.94,79.04 270 top
R32  20m  [R1206]  153.97,97.53 0 top
R33  3.3K  [0603]  154.92,100.62 90 top
R34  75K  [0603]  149.71,88.35 0 top
R35  3.3k  [R0603]  140.99,136.45 0 top
R36  2R  [R0603]  132.23,135.99 0 top
R37  75k  [R0603]  128.66,132.83 180 top
R38  fb2  [R0402]  39.72,50.83 270 top
R39  0.05R  [R0402]  25.26,50.53 0 top
R40  100k  [R0402]  24.16,60.93 90 top
R41  fb1  [R0402]  37.89,50.86 90 top
R42  330  [R0402]  62.51,64.92 180 top
R43  8.2k  [R0402]  30.94,50.09 0 top
R44  4.7R  [R0402]  40.56,56.9 0 top
R45  6.8k  [R0402]  40.53,54.26 0 top
R46  1k  [R0402]  25.88,56.64 270 top
R47  [R0402]  73.92,47.25 270 top
R48  [R0402]  80.39,55.51 270 top
R49  [R0402]  78.87,59 270 top
R50  [R0402]  86.02,52.12 270 top
R51  [R0402]  72.77,59.65 90 top
R52  [R0402]  46.3,8.76 180 top
R53  [R0402]  39.7,14.35 270 top
R54  [R0402]  42.24,11.3 90 top
R55  66.5R  [0402-RES]  140.7,40.34 90 top
R56  66.5R  [0402-RES]  142.81,8.74 180 top
R57  1K5  [0402-RES]  136.97,39.66 0 top
R58  1K  [R0402']  152.19,20.27 270 top
R59  3.3k  [R0402']  143.85,36.34 270 top
R60  [B25V]  152.84,25.85 90 top
R61  10k  [R0603]  135.77,31 180 top
R62  10k  [R0603]  138.22,9.34 180 top
R63  1.5k  [R0603]  153.3,43.22 270 top
R64  1.5k  [R0603]  139.98,4.15 180 top
R65  470  [R0603]  149.41,42.39 0 top
R66  470  [R0603]  139.95,6.25 180 top
R67  3.3k  [0402-RES]  142.61,53.24 0 top
RCTRL  [R0402]  90.77,96.47 180 top
RDSCG  [R1206W]  81.43,83.71 90 top
RF  [R0402]  76.77,83.37 90 top
RFBL  [R0603]  63.62,87.09 90 top
RFBL1  [R0402]  92.68,84.98 0 top
RFBL2  6k  [R0402]  92.7,86.54 0 top
RFBL3  [R0402]  92.75,88.15 0 top
RFBU  [R0402]  66.17,92.51 90 top
RG1  [R0402]  77.31,86.33 180 top
RG2  [R0603]  77.16,92.43 270 top
RGD1  [R0402]  67.79,92.65 270 top
RGD2  [R0402]  65.52,87.16 270 top
RL1  [R0402]  98.13,95.84 180 top
RL2  [R0402]  101.48,95.82 0 top
RL3  [R0402]  104.82,95.83 180 top
RS  [R0603]  77.61,80.41 180 top
RSEL  [R0402]  92.6,90.03 0 top
RSLEW  [R0603]  79.88,87.85 270 top
S1  [R0402]  93.92,96.16 270 top
S2  [R0402]  95.39,96.16 270 top
S3  [R0402]  92.59,91.77 180 top
S5  [R0402]  90.73,97.91 0 top
T1  BC847  [SOT23]  38.43,9.78 90 top
U1  FSMRA4JH  [SWITCH_FSMRA4JH]  64.16,12.8 0 top
U2  TEXAS_INSTRUMENTS_LM3489MM-NOPBTEXAS_INSTRUMENTS_LM3489MM-NOPB_0_0  [TEXAS_INSTRUMENTS_LM3489MM-NOPB_0]  71.72,131.65 270 top
U3  TEXAS_INSTRUMENTS_LM3489MM-NOPBTEXAS_INSTRUMENTS_LM3489MM-NOPB_0_0  [TEXAS_INSTRUMENTS_LM3489MM-NOPB_0]  73.32,54.26 270 top
U$1  [SOIC8]  6.49,106.53 90 top
U$2  [SOIC8]  6.44,106.49 270 bottom
U$3  [SOIC8]  6.44,100.86 90 top
U$4  [SOIC8]  6.38,100.88 270 bottom
U$5  [TSSOP-16]  7.75,70.76 180 top
U$6  [POGOPINSNEW]  5.74,16.44 0 top
U$7  POGOPINSNEW  [POGOPINSNEW']  5.74,16.44 0 top
U$8  [ETA9740]  4.83,17.07 0 top
U$9  POGOPINSNEW  [POGOPINSNEW']  103.37,107.49 270 top
U$10  POGOPINSNEW  [POGOPINSNEW']  67.36,107.5 270 top
U$11  POGOPINSNEW  [POGOPINSNEW']  31.38,107.5 270 top
U$12  DIO_V3PAN50  [DIO_V3PAN50-M3/I]  64.71,125.11 90 top
U$13  [QFN-32]  26.47,91.54 0 bottom
U$14  [TO263-5L]  51.12,85.45 270 top
U$15  POGOPINSNEW  [POGOPINSNEW']  5.76,88.43 0 top
U$16  POGOPINSNEW  [POGOPINSNEW']  5.81,52.44 0 top
U$17  POGOPINSNEW  [POGOPINSNEW']  5.78,124.4 0 top
U$18  [POGOPINSNEW]  5.78,124.41 0 top
U$19  [POGOPINSNEW]  5.75,88.43 0 top
U$20  [POGOPINSNEW]  5.82,52.44 0 top
U$21  [DIODE]  5.58,136.92 270 bottom
U$22  [DIODE]  3.49,136.92 270 bottom
U$23  [DIODE]  3.42,136.93 90 top
U$24  [DIODE]  5.57,136.96 90 top
U$25  [DIODE]  7.81,137.01 270 bottom
U$26  [DIODE]  7.85,136.99 90 top
U$27  LDL1117  [SOT230P700X180-4N]  46.13,90.32 270 bottom
U$28  MIDMOUNT  [MIDMOUNT]  144.52,130.06 90 top
U$29  POGOPINSNEW  [POGOPINSNEW'']  159.64,107.39 0 top
U$30  POGOPINSNEW  [POGOPINSNEW']  103.2,34.42 270 top
U$31  POGOPINSNEW  [POGOPINSNEW']  67.19,34.42 270 top
U$32  POGOPINSNEW  [POGOPINSNEW']  31.2,34.42 270 top
U$33  DIO_V3PAN50  [DIO_V3PAN50-M3/I]  64.53,52.03 90 top
U$34  DCLENOVOFEMALE  [DCLENOVOFEMALE]  23.9,18.8 270 top
U$35  DCLENOVOFEMALE  [DCLENOVOFEMALE]  108.12,18.77 270 top
U$36  LDL1117  [SOT230P700X180-4N]  70.43,19.68 0 bottom
U$37  [TO263-5L]  150.44,10.25 180 top
U$38  POGOPINSNEW  [POGOPINSNEW']  141.71,36.6 270 top
V1  [DPACK]  153.54,61.66 0 top

## Library data of the parts
1-21 = smdpad
C1-C7 C21-C34 C36 C40 C41 C44-C47 C63-C65 CIN = rcl; SPICEPREFIX: C
C8 C9 C17 C18 C48 C50 C57 C60 = cap-pan40
C10-C16 C49 C51-C56 C58 C59 CSLEW R13-R24 R38-R54 RCTRL RDSCG RF RFBL1-RFBL3 RFBU RG1 RGD1 RGD2 RL1-RL3 RSEL RSLEW S1-S3 S5 = resistor
C19 C20 CC1 CC2 CDVDD CF CVAUX CVPWR CVPWR1 CVTX = rcl
C35 C37 = capac2.2; MANUFACTURER_PART_NUMBER: UMA1E101MDD; VENDOR: Nichicon
C38 C39 C42 C43 = C2012X5R1C226K125AC; ARROW_PART_NUMBER: C2012X5R1C226K125AC; ARROW_PRICE-STOCK: https://www.arrow.com/en/products/c2012x5r1c226k125ac/tdk; DESCRIPTION: 0805 X5R ceramic capacitor 22uF 16V TDK 0805 C 22??F Ceramic Multilayer Capacitor, 16 V dc X5R Dielectric ??10% SMD; HEIGHT: 1.45mm; MANUFACTURER_NAME: TDK; MANUFACTURER_PART_NUMBER: C2012X5R1C226K125AC; RS_PART_NUMBER: 7883023P; RS_PRICE-STOCK: http://uk.rs-online.com/web/p/products/7883023P
C61 C62 D4 D5 IC6 R55-R57 R67 = SparkFun
CPDIN = Capacitor Kemet; MANUFACTURER_PART_NUMBER: T491C685K025AT; VENDOR: Kemet
CR1 = B520C; MANUFACTURER_PART_NUMBER: B520C13F; VENDOR: Diodes Inc
D1 D3 = SparkFun-LED
D2 D6 = diode
F1 = FUSE-4_reewoo; MANUFACTURER_PART_NUMBER: CC12H4ATR; VENDOR: Cooper Bussmann
F2 = polyfuse-smd_10; MF: Littelfuse; MPN: 1812L010; OC_FARNELL: 1822210; OC_NEWARK: 78R5551
IC = DECADE-libraries20151104
IC1 = TPS25740BRGER; ARROW_PART_NUMBER: TPS25740BRGER; ARROW_PRICE-STOCK: https://www.arrow.com/en/products/tps25740brger/texas-instruments; DESCRIPTION: USB Type-C and USB PD Source Controller; HEIGHT: 1mm; MANUFACTURER_NAME: Texas Instruments; MANUFACTURER_PART_NUMBER: TPS25740BRGER
IC2 IC4 = UC3843- TH; MANUFACTURER_PART_NUMBER: UC3843A_P_8; VENDOR: Texas Instruments
IC3 = si70xx-10; MF: Silicon Labs; MPN: Si7015-A10-FM; OC_FARNELL: unknown; OC_NEWARK: unknown
IC5 = SN74AUP1G74DCUR; ARROW_PART_NUMBER: SN74AUP1G74DCUR; ARROW_PRICE-STOCK: https://www.arrow.com/en/products/sn74aup1g74dcur/texas-instruments; DESCRIPTION: Low-Power Single Positive-Edge-Triggered D-Type Flip-Flop; HEIGHT: 0.9mm; MANUFACTURER_NAME: Texas Instruments; MANUFACTURER_PART_NUMBER: SN74AUP1G74DCUR; RS_PART_NUMBER: 1627353; RS_PRICE-STOCK: http://uk.rs-online.com/web/p/products/1627353
IND IND1 = inductor-smd
J1 J2 J4 = 3D_Molex 
J3 = nov; CENTROID_NOT_SPECIFIED: No; CONTACT_FINISH: Gold; CURRENT_RATING: 0.25A, 1A, 5A; DATASHEET: http://www.molex.com/pdm_docs/sd/1054500101_sd.pdf; DESCRIPTION: USB - C USB 3.1, Superspeed+ Receptacle Connector 24 Position Surface Mount, Right Angle; Through Hole; DIGIKEY_DESCRIPTION: CONN RCPT USB C 3.1 SMT R/A; DIGIKEY_PART_NUMBER: WM12856CT-ND; IS_FEMALE: yes; LEAD_FREE: yes; MATING_CYCLES: 10000; MF: Molex; MOUSER_PART_NUMBER: 538-105450-0101; MPN: 105450-0101; NUMBER_OF_PORTS: 1; PACKAGE: CONN_SMT_8MM94_7MM9_USB; PREFIX: J; ROHS: yes; SHIELDING: Shielded; TEMPERATURE_RANGE_HIGH: +85°C; TEMPERATURE_RANGE_LOW: -30°C; VOLTAGE_-_RATED: 30VAC/DC
JP1 LED6 LED7 = adafruit
JP2-JP4 = pinhead
L1 L2 L8 L9 = IHLP4040DZER220M11; ALLIED_NUMBER: 70411279; ALLIED_PRICE-STOCK: https://www.alliedelec.com/vishay-dale-ihlp4040dzer220m11/70411279/; DESCRIPTION: Vishay IHLP4040DZ-11 Series Shielded Wire-wound SMD Inductor with a Metal Composite Core, 22 H 20% Wire-Wound 5A Idc; HEIGHT: 4mm; MANUFACTURER_NAME: Vishay; MANUFACTURER_PART_NUMBER: IHLP4040DZER220M11; MOUSER_PART_NUMBER: 70-IHLP4040DZER220M1; MOUSER_PRICE-STOCK: https://www.mouser.com/Search/Refine.aspx?Keyword=70-IHLP4040DZER220M1; RS_PART_NUMBER: 7487268P; RS_PRICE-STOCK: http://uk.rs-online.com/web/p/products/7487268P
L3-L5 LED5 = eagle-ltspice; SPICEMODEL: NONE; SPICEPREFIX: D; SPICETYPE: diode
L6 L7 = IHLP-3232DZ-11
LED1-LED4 = led
MICROUSB = Micro_usb_3d
Q1 Q3 Q4 Q7 = CSD17579Q3A; ARROW_PART_NUMBER: CSD17579Q3A; ARROW_PRICE-STOCK: https://www.arrow.com/en/products/csd17579q3a/texas-instruments; DESCRIPTION: CSD17579Q3A 30 V N-Channel NexFET&#153; Power MOSFET; HEIGHT: mm; MANUFACTURER_NAME: Texas Instruments; MANUFACTURER_PART_NUMBER: CSD17579Q3A
Q2 Q5 Q6 Q8 = FDS4435BZ; AVAILABILITY: Unavailable; DESCRIPTION: P-Channel 30 V 20 mO Surface Mount PowerTrench Mosfet - SOIC-8; MF: ON Semiconductor; MP: FDS4435BZ; PACKAGE: SO-8 ON Semiconductor; PRICE: None
R1-R12 R25-R31 R35-R37 R58 R59 R61-R66 = rcl; SPICEPREFIX: R
R32 RFBL RG2 RS = eagle-ltspice; SPICEMODEL: NONE; SPICEPREFIX: R
R33 R34 = SparkFun-Resistors; PROD_ID: RES-09383
R60 = pot
T1 = transistor
U1 = FSMRA4JH; MANUFACTURER_PART_NUMBER: FSMRA4JH; VENDOR: TE Connectivity
U2 U3 = NOPB; CIIVA_IDS: 19361190; CODE__JEDEC: MO-187-AA; COMPONENT_LINK_1_DESCRIPTION: Datasheet URL; COMPONENT_LINK_1_URL: http://www.ti.com/general/docs/lit/getliterature.tsp?genericPartNumber=LM3489&fileType=pdf; COMP_TYPE: Switcher; FOOTPRINT_VARIANT_NAME_0: Level C; FOOTPRINT_VARIANT_NAME_1: Level B; FOOTPRINT_VARIANT_NAME_2: Level A; IMPORTED: yes; IMPORTED_FROM: vault; IMPORT_TS: 1521847679; MF: Texas Instruments; MPN: LM3489MM/NOPB; PACKAGE: DGK0008A; PACKAGE_DESCRIPTION: MINI SOIC, .118 x .118 x .034in, 8 Lead, .0256in Pitch; PACKAGE_TOP_MARKING: ZXTT*SKSB; PIN_COUNT: 8; POWER_WISE: N; PREFIX: U; RELEASE_DATE: 1464095363; ROHS: Yes; VAULT_GUID: 3975B42D-15CB-4FE8-B742-B4D8B955FC74; VAULT_REVISION: 115EDD9B-307C-45EF-81B2-4495B4FCF20F
U$1-U$4 = 4407a
U$5 = 8254AA
U$6 U$18-U$20 = pg3X2 - top
U$7 U$9-U$11 U$15-U$17 U$29-U$32 U$38 = pg3X2 - bottom
U$8 = ETA9740
U$12 U$33 = DIO_V3PAN50-M3_I
U$13 = IP2716
U$14 U$37 = TO263-5L
U$21-U$26 = BMSDIODE
U$27 U$36 = SOT230P700X180-4N
U$28 = USB Mid Mount
U$34 U$35 = dc lenovo female
V1 = v-reg

## Nets
5V: IC5.6 IC5.7 IC5.8 U1.1 U$36.VOUT U$36.VOUT1
5V1: R57.1
+5V: C29.1 C34.1 U$13.31 U$27.VOUT U$27.VOUT1
ADM: IC6.3 R56.2 R66.1
ADP: IC6.2 R55.2 R65.1
B1+: 1.P$1 2.P$1 21.P$1 C3.1 C4.1 C5.1 C6.1 C7.1 R7.1 R12.1 U$3.1 U$3.2 U$3.3 U$4.1 U$4.2 U$4.3 U$5.16
B1-B2+: 3.P$1 4.P$1 5.P$1 6.P$1 20.P$1 R11.1
B2-B3+: 7.P$1 8.P$1 9.P$1 10.P$1 19.P$1 R10.1
B3-B4+: 11.P$1 12.P$1 13.P$1 14.P$1 18.P$1 R9.1
BATTERY: F1.1 U$29.VCC
BUCK_IN: C31.1 IND.P$1 Q5.5-8 U$14.P$4
CC1: CC1.2 IC1.2 J2.A5
CC1_CH: C26.1 J4.A5 U$13.8
CC2: CC2.2 IC1.3 J2.B5
CC2_CH: C25.1 J4.B5 U$13.7
CC3: IC3.CC1 J1.A5
CC4: IC3.CC2 J1.B5
CH: U$6.CH U$7.CH U$15.CH U$16.CH U$17.CH U$18.CH U$19.CH U$20.CH U$23.A U$24.A U$26.A
CH1: C32.1 D2.C R31.2 U$9.CH U$10.CH U$11.CH
CH2: U$30.CH U$31.CH U$32.CH U$34.VCC U$34.VCC1
CH_G: Q5.1-3 Q6.1-3 R28.1
CLK: IC5.1 R54.2 U1.2
CLT1: IC1.6 RFBL1.1 RL1.1
CLT2: IC1.7 RFBL2.1 RL2.1
CLT3: IC1.8 RFBL3.1 RL3.1
COMP: C11.1 IC2.1 R15.2
COMP1: C51.1 IC4.1 R40.2 T1.3
D_CH: Q6.5-8 R26.1 R29.1
DIS: U$6.S2 U$7.VCC U$15.VCC U$16.VCC U$17.VCC U$18.S2 U$19.S2 U$20.S2 U$21.K U$22.K U$25.K
DM: IC.5 U$28.DM
DM1: IC3.DM J1.A7 J1.B7
DM2: D5.1 MICROUSB.2 R55.1 R57.2 R62.1 R64.2 R66.2
DM_CH: J4.A7 J4.B7 U$13.9
DP: IC.6 U$28.DP
DP1: IC3.DP J1.A6 J1.B6
DP2: D4.1 MICROUSB.3 R56.1 R61.1 R63.2 R65.2
DP_CH: J4.A6 J4.B6 U$13.12
DRAIN: U$1.5 U$1.6 U$1.7 U$1.8 U$2.5 U$2.6 U$2.7 U$2.8 U$3.5 U$3.6 U$3.7 U$3.8 U$4.5 U$4.6 U$4.7 U$4.8
DRAIN1: L1.2 Q1.5 Q1.6 Q1.7 Q1.8 U$12.A
DRAIN2: L8.2 Q7.5 Q7.6 Q7.7 Q7.8 U$33.A
DSCG: IC1.24 RDSCG.2
DVDD: CDVDD.1 IC1.13 S1.1 S3.2
EN: R24.1 U2.3
EN1: R51.1 U3.3
ENSRC: IC1.11
FB: C19.1 C20.2 RFBL1.2 RFBL2.2 RFBL3.2 RFBL.2 RFBU.1 U2.4
FB1: C51.2 IC4.2 R38.1 R40.1 R41.2
FC: C35.1 C39.2 C42.1 F1.2 IC3.VIN IC3.VIN2 IC3.VIN16 IC3.VIN17 IC3.VIN18 IC.7 R35.2
FC1: C48.- C54.1 F2.1 IC4.7 L8.1 R42.2
GATE: Q1.4 R19.2 R20.2
GATE1: Q7.4 R44.2 R45.2
GD: IC1.15
GDNG: IC1.22 RG1.1 RG2.1 RSLEW.2
GDNS: IC1.23 Q3.1 Q3.2 Q3.3 Q4.1 Q4.2 Q4.3
GND: 15.P$1 16.P$1 17.P$1 R5.2 R6.1 U$6.GND U$7.GND U$8.GND U$8.PGND U$15.GND U$16.GND U$17.GND U$18.GND U$19.GND U$20.GND
GND1: C8.+ C9.+ C10.2 C12.2 C13.2 C14.2 C15.2 C17.+ C18.+ C20.1 C21.2 C22.2 C23.2 C24.2 C25.2 C26.2 C27.2 C28.2 C29.2 C30.2 C31.2 C32.2 C33.2 C34.2 CC1.1 CC2.1 CDVDD.2 CPDIN.2 CR1.2 CSLEW.2 CVAUX.2 CVPWR1.1 CVTX.1 D1.C IC1.4 IC1.18 IC1.25 IC2.5 J2.1 J2.2 J2.3 J2.4 J2.A1 J2.A12 J2.B1 J2.B12 J4.1 J4.2 J4.3 J4.4 J4.A1 J4.A12 J4.B1 J4.B12 L3.C L4.C L5.C R14.1 R16.1 R20.1 R24.2 R30.1 RFBL.1 RGD2.2 RSEL.2 S2.1 S5.1 U2.2 U2.6 U$9.GND U$10.GND U$11.GND U$13.26 U$13.EP U$14.P$1 U$27.GND
GND2: C35.2 C37.2 C38.2 C39.1 C40.2 C41.2 C42.2 C43.2 C45.2 C46.2 C47.- IC3.AGND IC3.GND IC.9 J1.A1 J1.A12 J1.B1 J1.B12 LED5.C R33.2 R34.1 R37.2 U$28.GND U$28.NC1 U$28.NC2 U$29.GND
GND3: C48.+ C49.2 C50.+ C52.2 C53.2 C54.2 C55.2 C57.+ C59.2 C60.+ D3.C IC4.5 IC5.4 R39.1 R41.1 R45.1 R49.1 R51.2 R53.1 R54.1 U3.2 U3.6 U$30.GND U$31.GND U$32.GND U$34.GND U$34.GND1 U$35.GND U$35.GND1 U$36.GND
GND4: C61.2 C62.2 C63.2 C64.2 C65.2 CIN.- D4.2 D5.2 IC6.4 J3.A1 J3.A12 J3.B1 J3.B12 LED6.C LED7.C MICROUSB.5 R58.1 R63.1 R64.1 U$37.P$3 U$38.GND V1.4
ISNS: CF.1 IC1.19 RF.2
N$1: U$8.BAT
N$2: LED1.A LED2.C U$8.LED1
N$3: JP1.1 R8.1
N$4: LED1.C LED2.A LED3.C LED4.A U$8.LED3
N$5: R3.2 U$1.4 U$2.4
N$6: U$7.S1 U$7.S2
N$7: U$6.S1 U$6.VCC U$18.S1 U$18.VCC U$19.S1 U$19.VCC U$20.S1 U$20.VCC
N$8: R7.2 U$5.10
N$9: C4.2 R9.2 U$5.12
N$10: C5.2 R10.2 U$5.13
N$11: C6.2 R11.2 U$5.14
N$12: C7.2 R12.2 U$5.15
N$13: U$17.S1 U$17.S2
N$14: R8.2 U$5.11
N$15: R1.1 U$3.4 U$4.4 U$5.1
N$16: R2.1 U$5.2
N$17: R3.1 U$5.3
N$18: C1.1 U$5.5
N$19: C2.1 U$5.6
N$20: C1.2 C2.2 C3.2 R6.2 U$5.7
N$21: R4.1 U$5.4
N$22: R4.2 R5.1
N$23: U$16.S1 U$16.S2
N$24: U$15.S1 U$15.S2
N$25: LED3.A LED4.C U$8.LED2
N$26: C13.1 IC2.8 R18.2
N$27: R1.2 R2.2 U$1.1 U$1.2 U$1.3 U$2.1 U$2.2 U$2.3 U$21.A U$22.A U$23.K U$24.K U$25.A U$26.K
N$28: C10.1 IC2.3 R21.1
N$29: U$9.S1 U$9.S2
N$30: U$10.S1 U$10.S2
N$31: U$11.S1 U$11.S2
N$32: IC2.6 R19.1
N$33: C12.1 IC2.4 R18.1
N$34: D1.A R17.1
N$35: C16.2 R22.1 U2.5
N$36: Q2.4 U2.7
N$37: L2.1 Q2.5-8 R23.2
N$38: R23.1 U2.1
N$39: RGD1.2 RGD2.1
N$40: CVPWR.2
N$41: Q3.4 RG1.2
N$42: Q4.4 RG2.2
N$43: CSLEW.1 RSLEW.1
N$44: CVAUX.1 IC1.16
N$45: CVTX.2 IC1.1
N$46: IC1.12 RSEL.1 S3.1
N$47: IC1.5 S1.2 S2.2
N$48: L3.A RL1.2
N$49: L4.A RL2.2
N$50: L5.A RL3.2
N$51: Q5.4 Q6.4 R28.2 U$13.5
N$52: JP4.2 U$13.15
N$53: JP2.2 U$13.17
N$54: JP3.2 U$13.20
N$55: JP3.3 U$13.21
N$56: R30.2 R31.1 U$14.P$5
N$57: JP4.3 U$13.13
N$58: JP4.1 U$13.16
N$59: JP3.1 U$13.19
N$60: JP2.1 U$13.18
N$61: JP3.4 U$13.22
N$62: IC3.FS R34.2
N$63: C37.1 C40.1 C43.1 IC3.VSP L6.2 R32.1
N$64: C36.1 IC3.LX20 IC3.LX21 IC3.LX22 IC3.LX23 L6.1
N$65: C36.2 IC3.BST
N$66: IC.4 R37.1
N$67: LED5.A R35.1
N$68: C44.1 IC.1 IC.2 L7.2 R36.2
N$69: C44.2 IC.3
N$70: C45.1 R36.1
N$71: U$29.S1 U$29.S2
N$72: C53.1 IC4.8 R43.2
N$73: C49.1 IC4.3 R46.1
N$74: U$30.S1 U$30.S2
N$75: U$31.S1 U$31.S2
N$76: U$32.S1 U$32.S2
N$77: IC4.6 R44.1
N$78: C52.1 IC4.4 R43.1
N$79: D3.A R42.1
N$80: C56.2 R47.1 U3.5
N$81: Q8.4 U3.7
N$82: L9.1 Q8.5-8 R50.2
N$83: C58.2 C59.1 R48.1 R49.2 U3.4 U$35.FB
N$84: R50.1 U3.1
N$85: IC5.2 IC5.3
N$86: R52.2 T1.1
N$87: R53.2 T1.2
N$88: R58.2 R60.E U$37.P$2
N$89: C64.1 C65.1 D6.C R59.2 R60.A R60.S U$38.CH
N$90: LED6.A R59.1
N$91: C61.1 C62.1 IC6.8 V1.3
N$92: IC6.6 R67.1
N$93: LED7.A R67.2
PCTRL: IC1.14 RCTRL.2 S5.2
Q: IC5.5 R52.1
S: Q4.5 Q4.6 Q4.7 Q4.8 RF.1 RS.2
SENSEN: C23.1 R26.2 U$13.2
SENSEP: C24.1 R25.2 U$13.1
SOURCE: Q1.1 Q1.2 Q1.3 R14.2 R21.2
SOURCE1: Q7.1 Q7.2 Q7.3 R39.2 R46.2
SW: D2.A IND.P$2 U$14.P$3
SW1: D6.A IND1.P$2 U$37.P$4
VAUX: RCTRL.1
VBUS: CF.2 CPDIN.1 CR1.1 IC1.21 J2.A4 J2.A9 J2.B4 J2.B9 RDSCG.1 RS.1
VBUS1: C46.1 C47.+ IC.8 L7.1 U$28.V+
VBUS2: C63.1 CIN.+ IND1.P$1 J3.A4 J3.A9 J3.B4 J3.B9 MICROUSB.1 R61.2 R62.2 U$37.P$5 V1.1
VBUS_CH: C21.1 R27.1 U$13.32
VCC_CH: C28.1 U$13.30
VCON5V: C30.1 U$13.6
VDD: CVPWR.1 IC1.17
VDD_CH: C27.1 U$13.29
VFB: C11.2 IC2.2 R13.1 R15.1 R16.2
VIN: C8.- C14.1 IC2.7 L1.1 R17.2 U$9.VCC U$10.VCC U$11.VCC
VIN1: F2.2 U$30.VCC U$31.VCC U$32.VCC U$36.VIN
VIN_CH: C22.1 C33.1 J4.A4 J4.A9 J4.B4 J4.B9 R25.1 R27.2 R29.2 U$27.VIN
VOUT: C9.- C15.1 C16.1 Q2.1-3 R13.2 R22.2 U2.8 U$12.C
VOUT1: C38.1 C41.1 IC3.VOUT J1.A4 J1.A9 J1.B4 J1.B9 R32.2 R33.1
VOUT2: C57.- C58.1 C60.- L9.2 R48.2 U$35.VCC U$35.VCC1
VPWR: C17.- C18.- C19.2 CVPWR1.2 IC1.20 L2.2 Q3.5 Q3.6 Q3.7 Q3.8 RFBU.2 RGD1.1
VPWR1: C50.- C55.1 C56.1 Q8.1-3 R38.2 R47.2 U3.8 U$33.C